# Altium PCB Liq_Controller.PcbDoc
Units mil, origin at the board's own origin, x right, y up, seen from the top; angles counter-clockwise.
Board outline 1510.03 x 3426.03 mil, 4 copper layers (Top Layer, GND, PWR, Bottom Layer), stack 62.447 mil thick; 59 components, 44 nets, 279 pads, 104 vias.
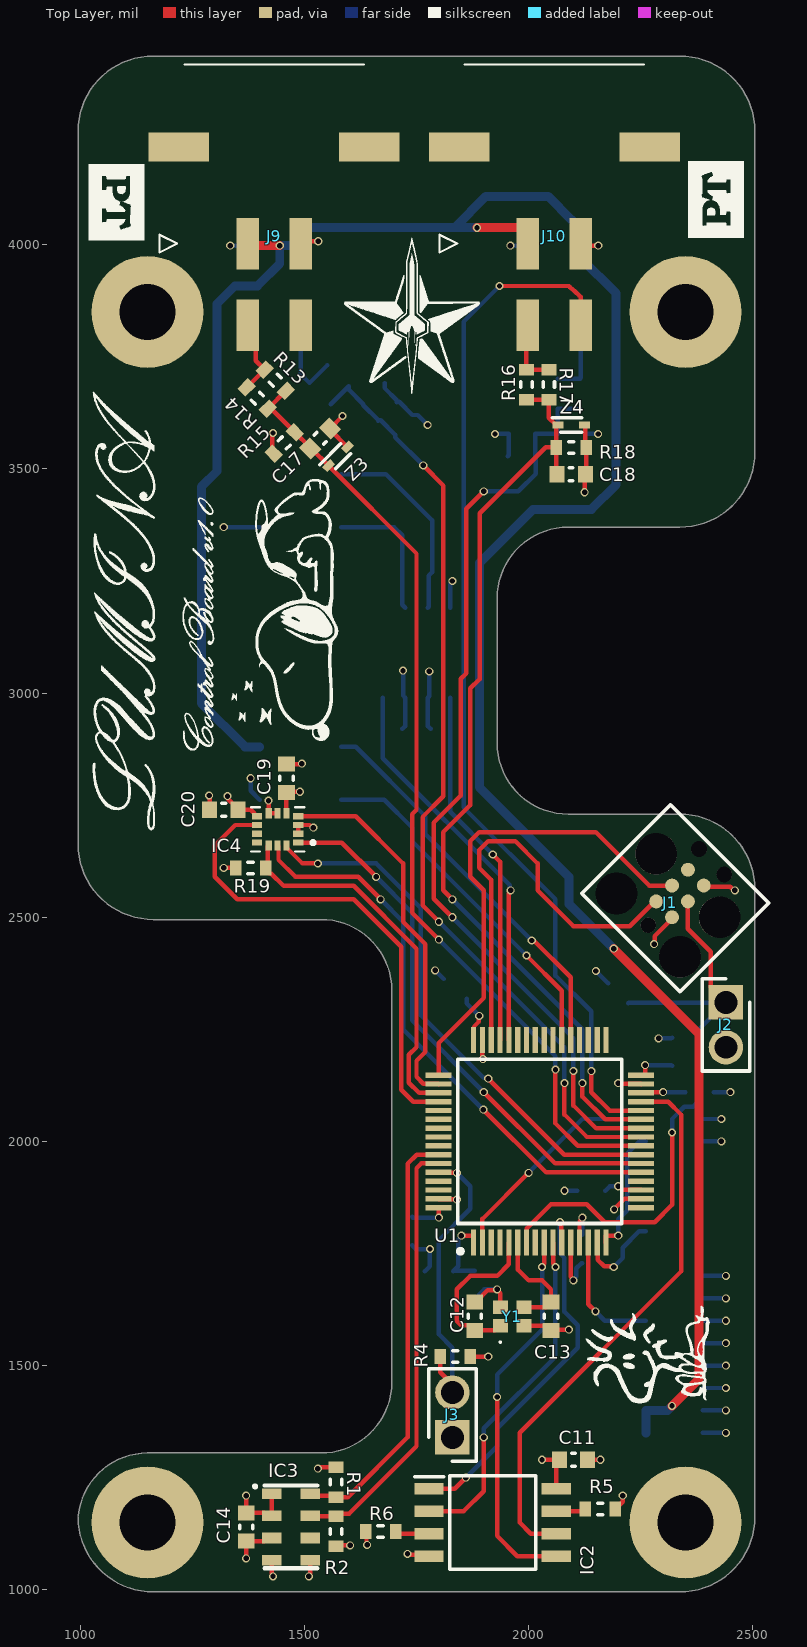
[diagram p0: Top Layer view]
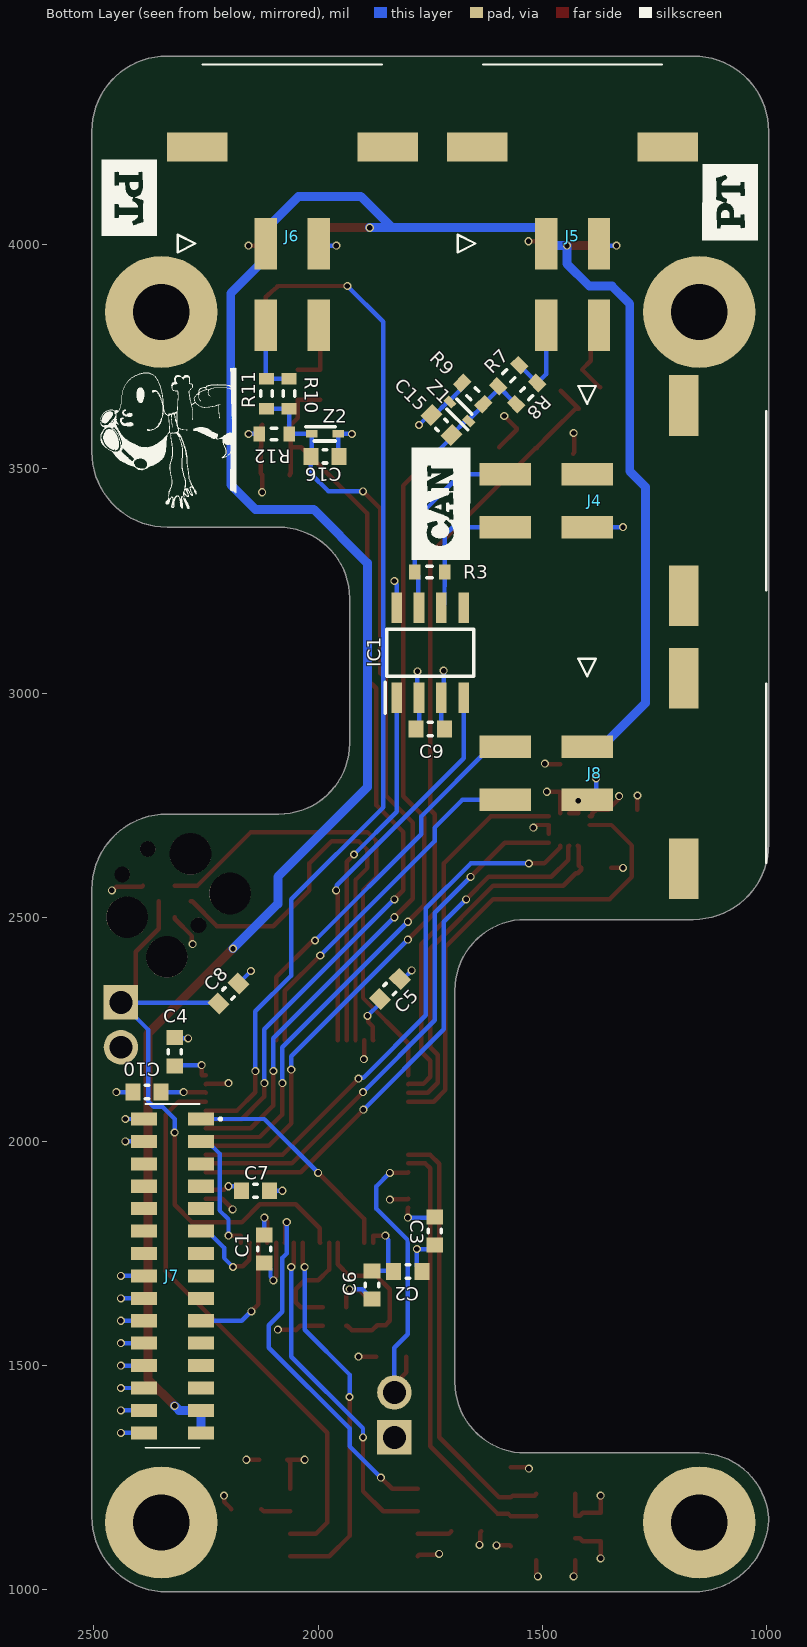
[diagram p1: Bottom Layer view, seen from below]
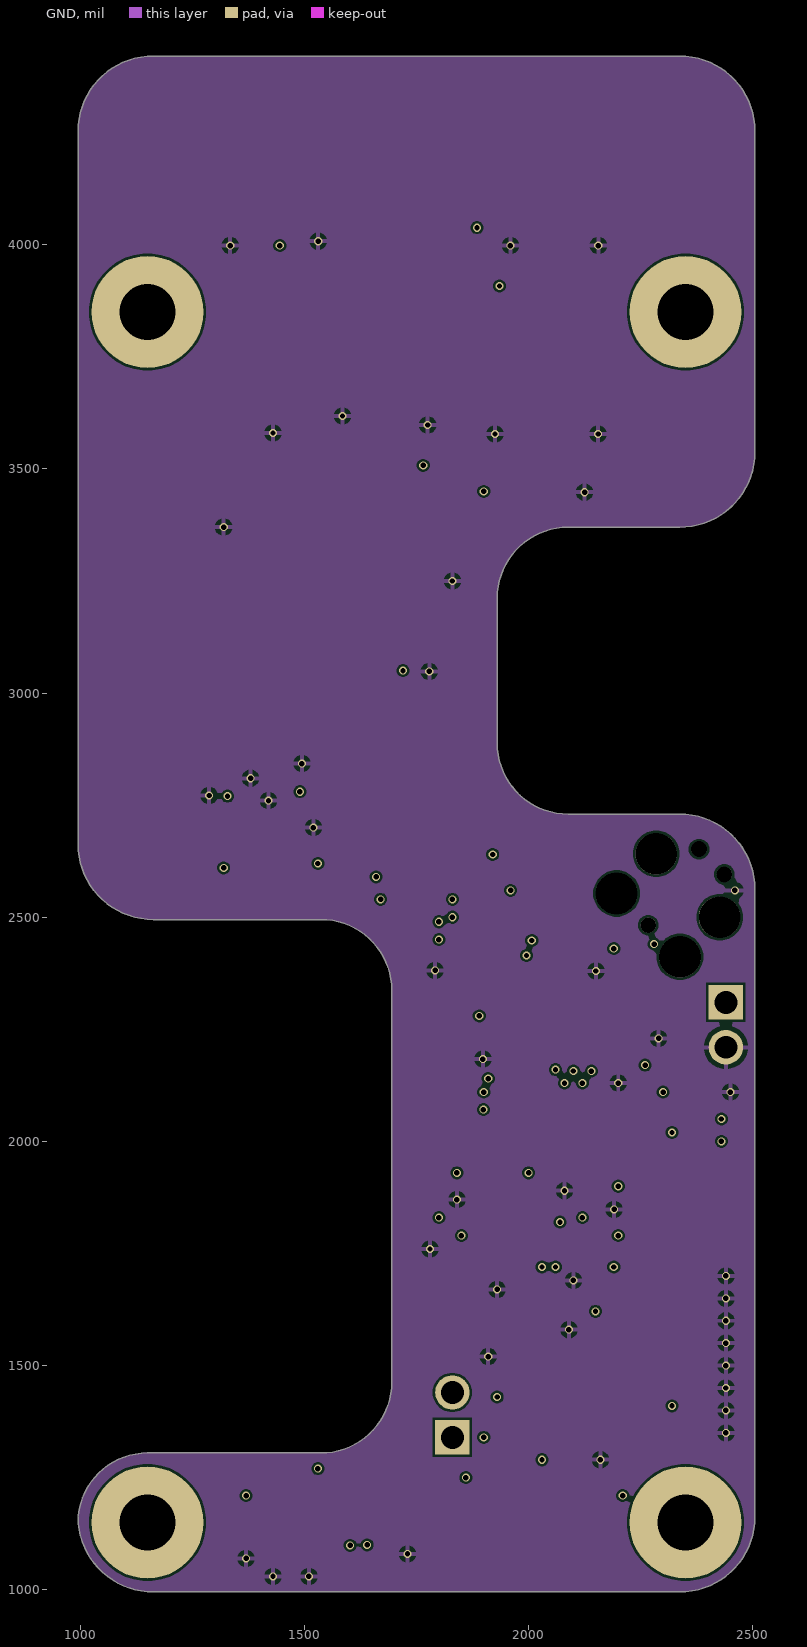
[diagram p2: GND]
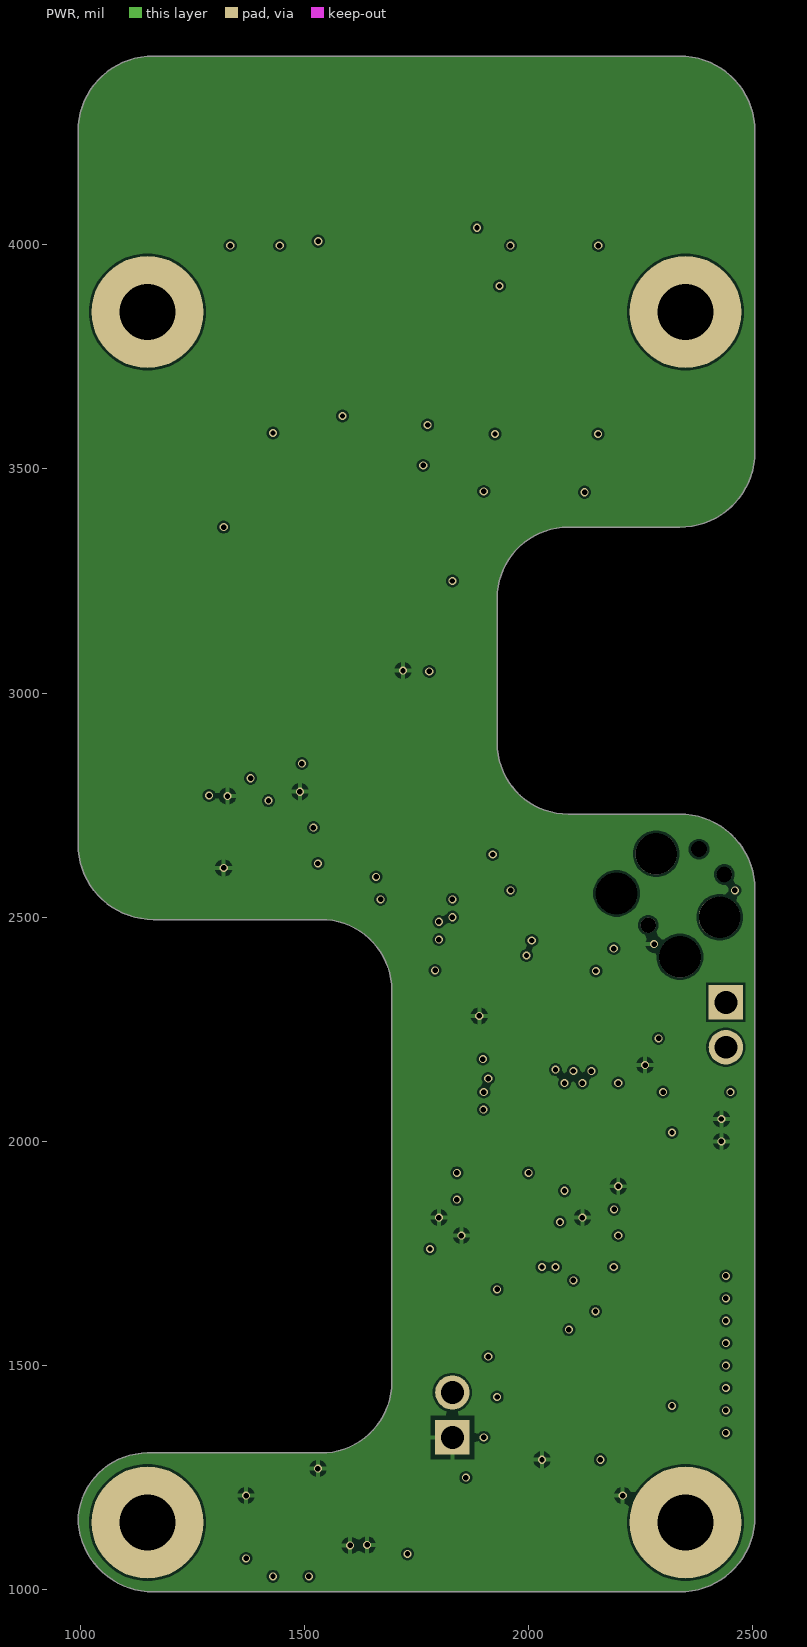
[diagram p3: PWR]
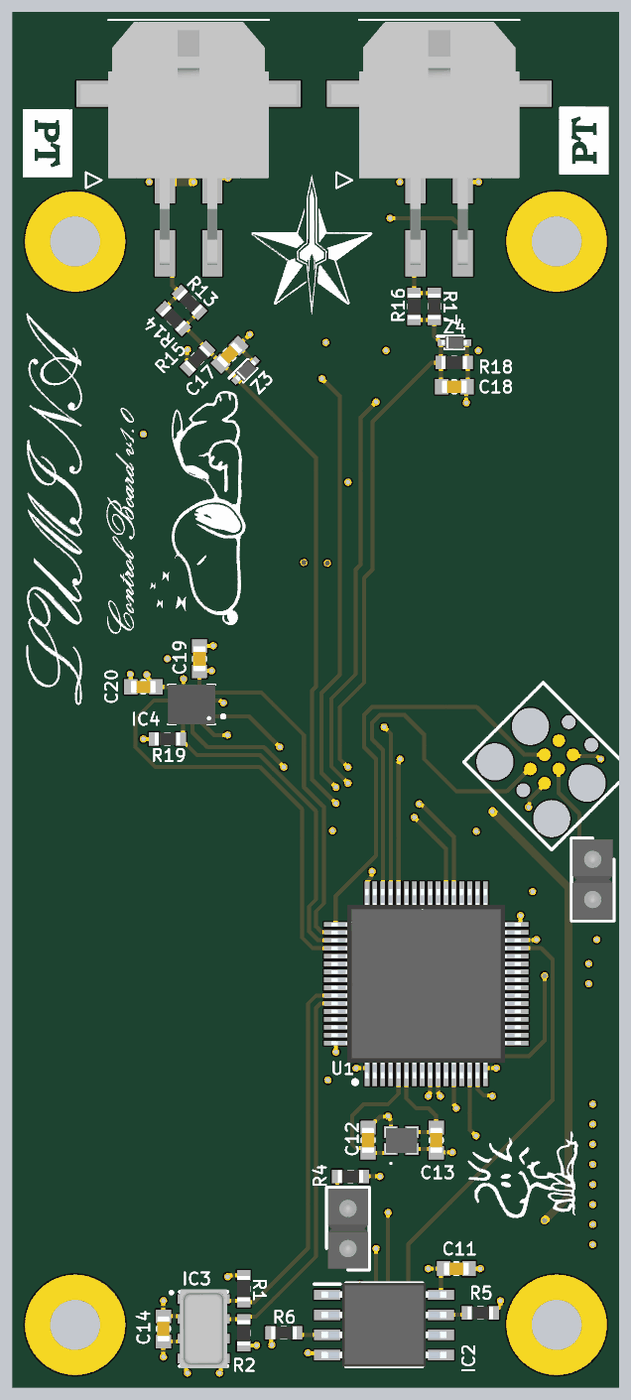
[diagram p4: 3D render of the assembled board from above, using the file's embedded part models]
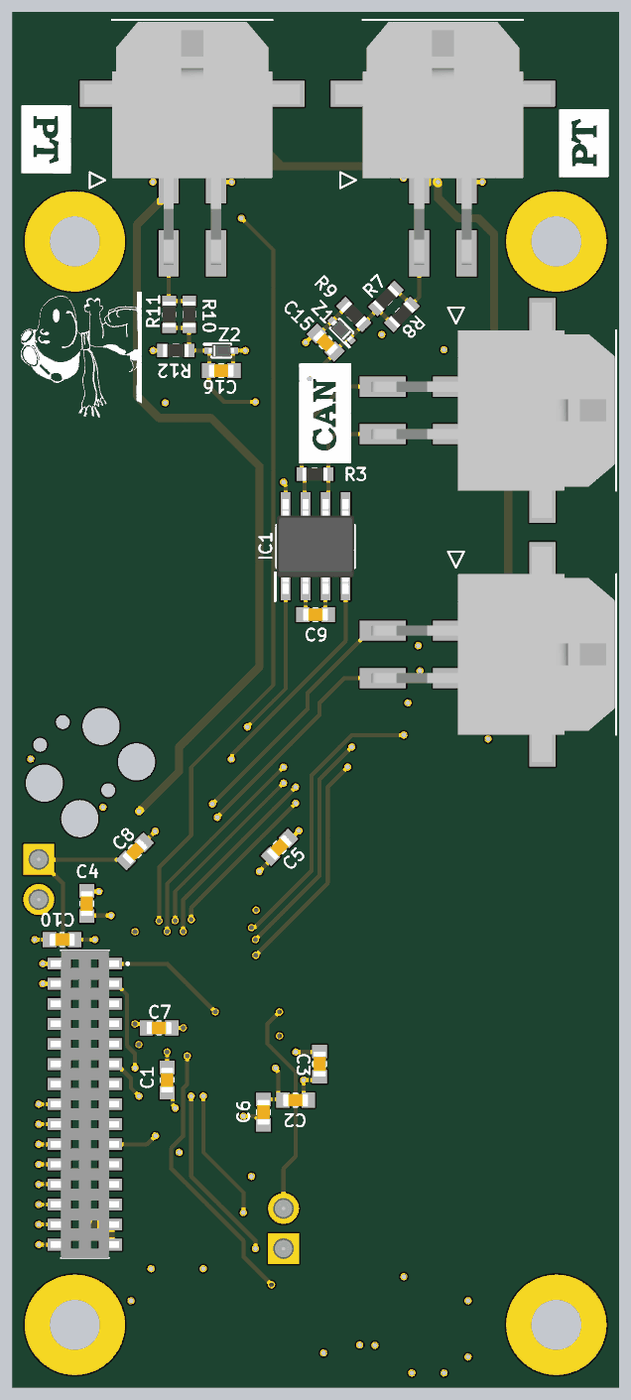
[diagram p5: 3D render of the assembled board from below, using the file's embedded part models]

## Layer stack, top to bottom
Top Solder: solder mask 0.4, Solder Resist, Dk 3.5
Top Layer: signal copper 1.378
Dielectric 2: prepreg 8.283, PP-006, Dk 4.1
GND: signal copper 0.598
Dielectric 1: dielectric 41.929, FR-4, Dk 4.8
PWR: signal copper 0.598
Dielectric 3: prepreg 8.283, PP-006, Dk 4.1
Bottom Layer: signal copper 1.378
Bottom Solder: solder mask 0.4, Solder Resist, Dk 3.5

## Board outline
995.71,1147.4 cw(c1213.58,1166.36) 995.12,1156.37 cw(c1162.94,1163) 994.99,1163 995.78,1165.72 cw(c1150,1150) 1150,1305.02 1537,1305.02 ccw(c1537,1463) 1694.98,1463 1694.98,2337 ccw(c1537,2337) 1537,2494.99 1163,2494.99 cw(c1163,2663) 994.99,2663 994.99,4253 cw(c1163,4253) 1163,4421.02 2337,4421.02 cw(c2337,4253) 2505.01,4253 2505.01,3538 cw(c2337,3538) 2337,3369.99 2088,3369.99 ccw(c2088,3212) 1930.02,3212 1930.02,2888 ccw(c2088,2888) 2088,2730.01 2337,2730.01 cw(c2337,2562) 2505.01,2562 2505.01,1163 cw(c2337,1163) 2337,994.99 1163,994.99 cw(c1163,1163)

## Design rules (kind name [scope] priority, off if disabled: settings)
Clearance [All] p1: gap=5 ignorepadtopadclearanceinfootprint=FALSE
PolygonConnect [All] p1: connectstyle=Relief reliefconductorwidth=10 reliefentries=4 polygonreliefangle="90 Angle" airgapwidth=10
RoutingVias [All] p1: holewidth=12 width=18 viastyle="Through Hole" minholewidth=12 minwidth=18 maxholewidth=28 maxwidth=50
SolderMaskExpansion [All] p1: expansion=4 istentingtop=FALSE
SupplyNets "Schematic Supply Nets_3" [InNet('VBAT')] p1: voltage=0.000
SupplyNets "Schematic Supply Nets_2" [InNet('+5')] p2: voltage=0.000
SupplyNets "Schematic Supply Nets_1" [InNet('VCC')] p3: voltage=0.000
SupplyNets "Schematic Supply Nets" [InNet('GND')] p4: voltage=0.000
Width [All] p1: maxlimit=50 minlimit=10 preferedwidth=10 minimp=50.000000 maximp=50.000000 favimp=50.000000
30 further rules are at their usual default settings.

## Classes and differential pairs
component class Liq_Controller: R1 R2 R19
component class Designator: C1 C2 C3 C4 C5 C6 C7 C8 C9 C10 C11 C12 C13 IC1 IC2 J1 J2 J3 R3 R4 R5 R6 U1 Y1

## Components (designator, comment, footprint, x,y, rotation, side; value= is the part's Value field where it differs from the comment)
C1 "100 nF" CAP_0603 2120,1760 r90 bottom
C2 "100 nF" CAP_0603 1800,1710 r0 bottom
C3 "100 nF" CAP_0603 1740,1800 r90 bottom
C4 "100 nF" CAP_0603 2320,2200 r270 bottom
C5 "1 uF" CAP_0603 1840,2340 r315 bottom
C6 "1 uF" CAP_0603 1880,1680 r90 bottom
C7 "10 nF" CAP_0603 2140,1890 r180 bottom
C8 "100 nF" CAP_0603 2200,2330 r315 bottom
C9 "100 nF" CAP_0603 1750,2920 r180 bottom
C10 "4.7 uF" CAP_0603 2381.5,2110 r0 bottom
C11 "100 nF" CAP_0603 2100,1290 r180 top
C12 "8 pF" CAP_0603 1880,1610 r270 top
C13 "8 pF" CAP_0603 2050,1610 r90 top
C14 "100 nF" CAP_0603 1370,1140 r90 top
C15 "10 nF" CAP_0603 1725,3598 r225 bottom
C16 "10 nF" CAP_0603 1985,3528 r0 bottom
C17 "10 nF" CAP_0603 1535,3568 r225 top
C18 "10 nF" CAP_0603 2095,3488 r180 top
C19 "100 nF" CAP_0603 1460,2810 r270 top
C20 "100 nF" CAP_0603 1320,2740 r0 top
IC1 "SN65HVD230DR" SOT127P600X175-8N 1750,3090 r90 bottom
IC2 "W25Q40RVSSJQ" SOIC127P790X216-8N 1920,1150 r0 top
IC3 "MS561101BA03-50" MS561101BA03-50 1470,1140 r0 top
IC4 "LSM6DSO32TR" XDCR_LSM6DSO32TR 1440.32,2695.93 r180 top
J1 "Tag-Connect" TC2030-MCP 2266.97,2482.32 r45 top
J2 "HEADER-2P" HDRV2W110P0X254_1X2_508X254X854P 2440,2310 r270 top
J3 "HEADER-2P" HDRV2W110P0X254_1X2_508X254X854P 1830,1340 r90 top
J4 "43045-0411" 43045-04YY_09101192 1491.14,3429.06 r90 bottom
J5 "43045-0411" 43045-04YY_09101192 1432.6,3911.5 r0 bottom
J6 "43045-0411" 43045-04YY_09101192 2057.4,3911.5 r0 bottom
J7 "CLP-115-02-L-D" CLP-115-02-XXX-D 2325,1700 r270 bottom
J8 "43045-0411" 43045-04YY_09101192 1491.14,2820.94 r90 bottom
J9 "43045-0411" 43045-04YY_09101192 1432.6,3911.5 r180 top
J10 "43045-0411" 43045-04YY_09101192 2057.4,3911.5 r180 top
R1 "10KΩ" RES_0603 1570,1240 r90 top
R2 "10KΩ" RES_0603 1570,1130 r270 top
R3 "120Ω" RES_0603 1751.54,3270 r180 bottom
R4 "100KΩ" RES_0603 1836.54,1520 r180 top
R5 "10KΩ" RES_0603 2160,1180 r0 top
R6 "10KΩ" RES_0603 1670,1130 r180 top
R7 "10KΩ" RES_0603 1575,3708 r135 bottom
R8 "0Ω" RES_0603 1535,3668 r135 bottom
R9 "15KΩ" RES_0603 1655,3668 r225 bottom
R10 "10KΩ" RES_0603 2065,3668 r90 bottom
R11 "0Ω" RES_0603 2115,3668 r90 bottom
R12 "15KΩ" RES_0603 2098.46,3578 r180 bottom
R13 "10KΩ" RES_0603 1435,3698 r135 top
R14 "0Ω" RES_0603 1395,3658 r135 top
R15 "15KΩ" RES_0603 1455,3558 r45 top
R16 "10KΩ" RES_0603 1995,3688 r90 top
R17 "0Ω" RES_0603 2045,3688 r90 top
R18 "15KΩ" RES_0603 2095,3548 r180 top
R19 "10KΩ" RES_0603 1380,2610 r180 top
U1 "STM32F446RET6" QFP50P1200X1200X160-64N 2025,2000 r90 top
Y1 "NX2016SA-16MHZ-EXS00A-CS07826" NX2016SA16MHZEXS00ACS07826 1963.43,1609.33 r0 top
Z1 "SZMM5Z3V9T1G" SODFL1608X70N 1685,3628 r45 bottom
Z2 "SZMM5Z3V9T1G" SODFL1608X70N 1985,3578 r180 bottom
Z3 "SZMM5Z3V9T1G" SODFL1608X70N 1575,3528 r45 top
Z4 "SZMM5Z3V9T1G" SODFL1608X70N 2095,3598 r0 top

## Footprints (in the part's own frame and the unit in brackets; to place one, negate y for a bottom-side part, rotate by r counter-clockwise, add the part's x,y. Pads: shape width x height; smd on the part's side, far side on the other; paste and mask are expansions set on the pad)
43045-04YY_09101192 [mm]
  rect 1.27x2.92 smd: 1(1.5,-2.315) 2(-1.5,-2.315) 3(1.5,2.315) 4(-1.5,2.315)
  rect 3.43x1.65 smd: 5(5.395,-7.785) 6(-5.395,-7.785)
  silkscreen extent -5.07,-12.45 6.5,-1.82, body extent -6.83,-12.35 6.83,3.04, height 8.77
CAP_0603 [mm] "0603 Generic Capacitor"
  rect 0.85x0.95 smd: 1(-0.8,0) 2(0.8,0)
  silkscreen extent -0.1,-0.38 0.1,0.38, body extent -0.8,-0.4 0.8,0.4, height 0.8
CLP-115-02-XXX-D [mm]
  rect 0.74x1.47 smd: 1(-8.89,1.615) 2(-8.89,-1.615) 3(-7.62,1.615) 4(-7.62,-1.615) 5(-6.35,1.615) 6(-6.35,-1.615) 7(-5.08,1.615) 8(-5.08,-1.615) 9(-3.81,1.615) 10(-3.81,-1.615) 11(-2.54,1.615) 12(-2.54,-1.615) 13(-1.27,1.615) 14(-1.27,-1.615) 15(0,1.615) 16(0,-1.615) 17(1.27,1.615) 18(1.27,-1.615) 19(2.54,1.615) 20(2.54,-1.615) 21(3.81,1.615) 22(3.81,-1.615) 23(5.08,1.615) 24(5.08,-1.615) 25(6.35,1.615) 26(6.35,-1.615) 27(7.62,1.615) 28(7.62,-1.615) 29(8.89,1.615) 30(8.89,-1.615)
  silkscreen extent -9.74,-1.53 9.74,2.76, body extent -9.74,-2.16 9.74,2.16, height 2.29
HDRV2W110P0X254_1X2_508X254X854P [mm]
  rect 1.95x1.95 hole 1.3: 1(0,0)
  round 1.95 hole 1.3: 2(2.54,0)
  silkscreen extent -1.35,-1.35 3.89,1.35, body extent -1.27,-1.27 3.81,1.27, height 8.54
MS561101BA03-50 [mm]
  rect 1.1x0.6 smd: 1(-1.1,1.875) 2(-1.1,0.625) 3(-1.1,-0.625) 4(-1.1,-1.875) 5(1.1,-1.875) 6(1.1,-0.625) 7(1.1,0.625) 8(1.1,1.875)
  silkscreen extent -2.08,-2.35 1.5,2.35, body extent -1.5,-2.5 1.5,2.5, height 0.95
NX2016SA16MHZEXS00ACS07826 [mm]
  rect 0.85x0.75 smd: 1(-0.675,-0.525) 2(0.675,-0.525) 3(0.675,0.525) 4(-0.675,0.525)
  silkscreen extent -0.72,-1.5 -0.63,-1.4, body extent -1.03,-0.82 1.02,0.82, height 0.6
QFP50P1200X1200X160-64N [mm]
  rect 1.475x0.3 smd: 1(-5.738,3.75) 2(-5.738,3.25) 3(-5.738,2.75) 4(-5.738,2.25) 5(-5.738,1.75) 6(-5.738,1.25) 7(-5.738,0.75) 8(-5.738,0.25) 9(-5.738,-0.25) 10(-5.738,-0.75) 11(-5.738,-1.25) 12(-5.738,-1.75) 13(-5.738,-2.25) 14(-5.738,-2.75) 15(-5.738,-3.25) 16(-5.738,-3.75) 33(5.738,-3.75) 34(5.738,-3.25) 35(5.738,-2.75) 36(5.738,-2.25) 37(5.738,-1.75) 38(5.738,-1.25) 39(5.738,-0.75) 40(5.738,-0.25) 41(5.738,0.25) 42(5.738,0.75) 43(5.738,1.25) 44(5.738,1.75) 45(5.738,2.25) 46(5.738,2.75) 47(5.738,3.25) 48(5.738,3.75)
  rect 0.3x1.475 smd: 17(-3.75,-5.738) 18(-3.25,-5.738) 19(-2.75,-5.738) 20(-2.25,-5.738) 21(-1.75,-5.738) 22(-1.25,-5.738) 23(-0.75,-5.738) 24(-0.25,-5.738) 25(0.25,-5.738) 26(0.75,-5.738) 27(1.25,-5.738) 28(1.75,-5.738) 29(2.25,-5.738) 30(2.75,-5.738) 31(3.25,-5.738) 32(3.75,-5.738) 49(3.75,5.738) 50(3.25,5.738) 51(2.75,5.738) 52(2.25,5.738) 53(1.75,5.738) 54(1.25,5.738) 55(0.75,5.738) 56(0.25,5.738) 57(-0.25,5.738) 58(-0.75,5.738) 59(-1.25,5.738) 60(-1.75,5.738) 61(-2.25,5.738) 62(-2.75,5.738) 63(-3.25,5.738) 64(-3.75,5.738)
  silkscreen extent -6.35,-4.65 4.65,4.65, body extent -6,-6 6,6, height 1.6
RES_0603 [mm] "0603 Generic Resistor"
  rect 0.65x0.85 smd: 1(-0.85,0) 2(0.85,0)
  silkscreen extent -0.15,-0.33 0.15,0.33, body extent -0.8,-0.4 0.8,0.4, height 0.45
SODFL1608X70N [mm]
  rect 0.64x0.42 smd: 1(-0.75,0) 2(0.75,0)
  silkscreen extent -1.07,-0.4 0.6,0.4, body extent -0.8,-0.4 0.8,0.4, height 0.7
SOIC127P790X216-8N [mm]
  rect 1.65x0.65 smd: 1(-3.6,1.905) 2(-3.6,0.635) 3(-3.6,-0.635) 4(-3.6,-1.905) 5(3.6,-1.905) 6(3.6,-0.635) 7(3.6,0.635) 8(3.6,1.905)
  silkscreen extent -4.43,-2.64 2.42,2.64, body extent -3.95,-2.64 3.95,2.64, height 2.16
SOT127P600X175-8N [mm]
  rect 1.75x0.6 smd: 1(-2.55,1.905) 2(-2.55,0.635) 3(-2.55,-0.635) 4(-2.55,-1.905) 5(2.55,-1.905) 6(2.55,-0.635) 7(2.55,0.635) 8(2.55,1.905)
  silkscreen extent -3.42,-2.45 1.33,2.56, body extent -3.01,-2.45 3.01,2.45, height 1.63
TC2030-MCP [mil]
  round 31 smd paste-99999: 1(50,-25) 2(50,25) 3(100,-25) 4(100,25) 5(150,-25) 6(150,25)
  round 34 hole 35 unplated: A(0,0) B(200,40) C(200,-40)
  round 92 hole 93 unplated: D(0,-100) E(125,-100) F(0,100) G(125,100)
  silkscreen extent -55,-155 225,155
XDCR_LSM6DSO32TR [mm]
  rect 0.575x0.35 smd mask+0.05: 1(-1.162,0.75) 2(-1.162,0.25) 3(-1.162,-0.25) 4(-1.162,-0.75) 8(1.162,-0.75) 9(1.162,-0.25) 10(1.162,0.25) 11(1.162,0.75)
  rect 0.35x0.575 smd mask+0.05: 5(-0.5,-0.913) 6(0,-0.913) 7(0.5,-0.913) 12(0.5,0.913) 13(0,0.913) 14(-0.5,0.913)
  silkscreen extent -2.1,-1.25 1.5,1.25, body extent -1.5,-1.25 1.5,1.25, height 0.86

## Part data
C1 C2 C3 C4 C8 C9 C14: library part "100 nF Capacitor, 0603", "Multilayer Ceramic Capacitors MLCC - SMD/SMT KGM15BR71H104JT NEW GLOBAL PN 50V 0.1uF A 581-KGM15BR71H104JT", Manufacturer 1="KYOCERA AVX", Manufacturer Part Number 1=06035C104JAT2A, Package=0603, Supplier Part Number 1=581-06035C104JAT2A, Tolerance=5%, Voltage="50 V", Design Item ID="100 nF Capacitor, 0603", Library Ref=Capacitor_BASE, Supplier 1=Mouser
C5 C6: library part "1 uF Capacitor, 0603", "Multilayer Ceramic Capacitors MLCC - SMD/SMT KGM15BR71H224JT NEW GLOBAL PN 50V 0.22uF A 581-KGM15BR71H224JT", Manufacturer 1="KYOCERA AVX", Manufacturer Part Number 1=06033C105KAT2A, Package=0603, Supplier Part Number 1=581-06033C105KAT2A, Tolerance=10%, Voltage="25 V", Design Item ID="1 uF Capacitor, 0603", Library Ref=Capacitor_BASE, Supplier 1=Mouser
C7: library part "10 nF Capacitor, 0603", "Multilayer Ceramic Capacitors MLCC - SMD/SMT KGM15AR71H103JM NEW GLOBAL PN 50V 0.01uF A 581-KGM15AR71H103JM", Manufacturer 1="KYOCERA AVX", Manufacturer Part Number 1=06035C103JAT4A, Package=0603, Supplier Part Number 1=581-06035C103JAT4A, Tolerance=5%, Voltage="50 V", Design Item ID="10 nF Capacitor, 0603", Library Ref=Capacitor_BASE, Supplier 1=Mouser
C10: library part "4.7 uF Capacitor, 0603", "Multilayer Ceramic Capacitors MLCC - SMD/SMT KGM15BR71H224JT NEW GLOBAL PN 50V 0.22uF A 581-KGM15BR71H224JT", Manufacturer 1="KYOCERA AVX", Manufacturer Part Number 1=06033D475KAT2A, Package=0603, Supplier Part Number 1=581-06033D475KAT2A, Tolerance=10%, Voltage="25 V", Design Item ID="4.7 uF Capacitor, 0603", Library Ref=Capacitor_BASE, Supplier 1=Mouser
C11 C19 C20: library part "100 nF Capacitor, 0603", "Multilayer Ceramic Capacitors MLCC - SMD/SMT KGM15BR71H104JT NEW GLOBAL PN 50V 0.1uF A 581-KGM15BR71H104JT", Manufacturer 1="KYOCERA AVX", Manufacturer Part Number 1=06035C104JAT2A, MPN=581-06035C104JAT2A, Package=0603, Tolerance=5%, Voltage="50 V", Design Item ID="100 nF Capacitor, 0603", Library Ref=Capacitor_BASE, Supplier 1=Mouser
C12 C13: library part "8 pF Capacitor, 0603", "Multilayer Ceramic Capacitors MLCC - SMD/SMT 50V 8pF C0G 0603 5%", Manufacturer 1="KYOCERA AVX", Manufacturer Part Number 1=06035A8R0JAT2A, Package=0603, Supplier Part Number 1=581-06035A8R0JAT2A, Tolerance=5%, Voltage="50 V", Design Item ID="8 pF Capacitor, 0603", Library Ref=Capacitor_BASE, Supplier 1=Mouser
C15 C16 C17 C18: library part "10 nF Capacitor, 0603", "Multilayer Ceramic Capacitors MLCC - SMD/SMT KGM15AR71H103JM NEW GLOBAL PN 50V 0.01uF A 581-KGM15AR71H103JM", Manufacturer 1="KYOCERA AVX", Manufacturer Part Number 1=06035C103JAT4A, MPN=581-06035C103JAT4A, Package=0603, Tolerance=5%, Voltage="50 V", Design Item ID="10 nF Capacitor, 0603", Library Ref=Capacitor_BASE, Supplier 1=Mouser
IC1: "CAN Transceiver", Manufacturer_Name="Texas Instruments", Mouser Part Number=595-SN65HVD230DR, Arrow Part Number=SN65HVD230DR, Arrow Price/Stock=https://www.arrow.com/en/products/sn65hvd230dr/texas-instruments?utm_currency=USD&region=nac, Datasheet Link=http://www.ti.com/lit/gpn/sn65hvd230, Height=1.75mm, Manufacturer_Part_Number=SN65HVD230DR, Mouser Price/Stock=https://www.mouser.co.uk/ProductDetail/Texas-Instruments/SN65HVD230DR?qs=QViXGNcIEAtifeQR3pYVUQ%3D%3D
IC2: "4 Mbit NOR Flash", Manufacturer_Name=Winbond, MPN=454-W25Q40RVSSJQ, Datasheet Link=https://www.winbond.com/hq/search-resource-file.jsp?partNo=W25Q40RVSSJQ&type=datasheet, Height=2.16mm, Manufacturer_Part_Number=W25Q40RVSSJQ
IC3: "Integrated Circuit", Manufacturer_Name="TE Connectivity", MPN=824-MS561101BA03-50, Arrow Part Number=MS561101BA03-50, Arrow Price/Stock=https://www.arrow.com/en/products/ms561101ba03-50/te-connectivity?utm_currency=USD&region=nac, Datasheet Link=https://www.te.com/commerce/DocumentDelivery/DDEController?Action=srchrtrv&DocNm=MS5611-01BA03&DocType=Data%20Sheet&DocLang=English&PartCntxt=MS561101BA03-50&DocFormat=pdf, Manufacturer_Part_Number=MS561101BA03-50, Mouser Price/Stock=https://www.mouser.co.uk/ProductDetail/Measurement-Specialties/MS561101BA03-50?qs=%252BgKeJhng5iV%252BnCz6Qd5iDw%3D%3D, Supplier 1=Mouser, Supplier Part Number 1=824-MS561101BA03-50
IC4: "Accelerometer, Gyroscope, Temperature, 6 Axis Sensor IÂ²C, SPI Output", MPN=511-LSM6DSO32TR, Package="VFLGA-14 STMicroelectronics", Check_prices=https://www.snapeda.com/parts/LSM6DSO32TR/STMicroelectronics/view-part/?ref=eda, MF=STMicroelectronics, SnapEDA_Link=https://www.snapeda.com/parts/LSM6DSO32TR/STMicroelectronics/view-part/?ref=snap
J1: "Tag-Connect Programming Connector"
J2 J3: "Connector / 61300211121", Manufacturer_Name="Wurth Elektronik", Manufacturer_Part_Number=61300211121, Mouser Part Number=710-61300211121, Datasheet Link=https://componentsearchengine.com/Datasheets/2/61300211121.pdf, Height=8.54mm, Mouser Price/Stock=https://www.mouser.co.uk/ProductDetail/Wurth-Elektronik/61300211121?qs=t4813l51qx%252B1A5GYDQxPlw%3D%3D
J4 J5 J6 J8 J9 J10: "Connector", Manufacturer_Name=Molex, Mouser Part Number=538-43045-0411, Datasheet Link=https://www.molex.com/pdm_docs/sd/430450209_sd.pdf, Height=8.77mm, Manufacturer_Part_Number=43045-0411, Mouser Price/Stock=https://www.mouser.co.uk/ProductDetail/Molex/43045-0411?qs=UeCeOHRHQeZrBAGCFCweeA%3D%3D
J7: "2x15 Board to Board", Manufacturer_Name=SAMTEC, Mouser Part Number=200-CLP11502LD, Arrow Part Number=CLP-115-02-L-D, Arrow Price/Stock=https://www.arrow.com/en/products/clp-115-02-l-d/samtec, Datasheet Link=https://www.samtec.com/products/clp, Manufacturer_Part_Number=CLP-115-02-L-D, Mouser Price/Stock=https://www.mouser.co.uk/ProductDetail/Samtec/CLP-115-02-L-D?qs=0lQeLiL1qyYF3PC5crt2Dg%3D%3D
R1 R2 R5 R6 R7 R10 R13 R16 R19: library part "10 KOhm Resistor", "Thick Film Resistors - SMD General Purpose Chip Resistor 0603, 10kOhms, 1%, 1/10W", Manufacturer 1=YAGEO, Manufacturer Part Number 1=RC0603FR-0710KL, MPN=603-RC0603FR-0710KL, Package=0603, Power=0.1W, Tolerance=0.01, Design Item ID="10 KOhm Resistor", Library Ref=Resistor_BASE, Supplier 1=Mouser
R3: library part "120 Ohm Resistor", "Thick Film Resistors - SMD General Purpose Chip Resistor 0603, 120Ohms, 1%, 1/10W", Manufacturer 1=YAGEO, Manufacturer Part Number 1=RC0603FR-07120RL, Package=0603, Power=0.1W, Supplier Part Number 1=603-RC0603FR-07120RL, Tolerance=0.01, Design Item ID="120 Ohm Resistor", Library Ref=Resistor_BASE, Supplier 1=Mouser
R4: library part "100 KOhm Resistor", "Thick Film Resistors - SMD General Purpose Chip Resistor 0603, 100kOhms, 1%, 1/10W", Manufacturer 1=YAGEO, Manufacturer Part Number 1=RC0603FR-07100KL, Package=0603, Power=0.1W, Supplier Part Number 1=603-RC0603FR-07100KL, Tolerance=0.01, Design Item ID="100 KOhm Resistor", Library Ref=Resistor_BASE, Supplier 1=Mouser
R8 R11 R14 R17: library part "0 Ohm Resistor", "Thick Film Resistors - SMD General Purpose Chip Resistor 0603, 0Ohms, 1%, 1/10W", Manufacturer 1=YAGEO, Manufacturer Part Number 1=RC0603FR-070RL, MPN=603-RC0603FR-070RL, Package=0603, Power=0.1W, Tolerance=0.01, Design Item ID="0 Ohm Resistor", Library Ref=Resistor_BASE, Supplier 1=Mouser
R9 R12 R15 R18: library part "15 KOhm Resistor", "Thick Film Resistors - SMD General Purpose Chip Resistor 0603, 15kOhms, 1%, 1/10W", Manufacturer 1=YAGEO, Manufacturer Part Number 1=RC0603FR-0715KL, MPN=603-RC0603FR-0715KL, Package=0603, Power=0.1W, Tolerance=0.01, Design Item ID="15 KOhm Resistor", Library Ref=Resistor_BASE, Supplier 1=Mouser
U1: "ARM Cortex-M4 32-bit MCU+FPU, 512 KB Flash, 128 KB Internal RAM, 50 I/Os, 64-Pin LQFP, -40 to 85 degC, Tray", I/Os (High Current)=50, Operating Frequency(F) (Processor speed) (MHz)=180, Package Description=LQFP64, Package Reference="64-Pin Low-profile Quad Flat Package, Body 10 x 10 mm, Pitch 0.5 mm", Supply Voltage(Vcc) min (V)=1.7, ComponentLink1Description="Manufacturer URL", ComponentLink1URL=http://www.st.com/, ComponentLink2Description=Datasheet, ComponentLink2URL=http://www.st.com/st-web-ui/static/active/en/resource/technical/document/datasheet/DM00141306.pdf, Core="ARM Cortex-M4", D/A Converter=2, DatasheetVersion="Rev. 6", FLASH Size (Prog) (kB)=512, Internal RAM Size (kB)=128, Mounting Technology="Surface Mount", Packing=Tray
Y1: "Crystal Oscillator", Manufacturer_Name=NDK, Mouser Part Number=344-MHZEXS00ACS07826, Datasheet Link=https://www.ndk.com/images/products/catalog/c_NX2016SA_e.pdf, Height=0.5mm, Manufacturer_Part_Number=NX2016SA-16MHZ-EXS00A-CS07826, Mouser Price/Stock=https://www.mouser.co.uk/ProductDetail/NDK/NX2016SA-16MHZ-EXS00A-CS07826?qs=%252BXxaIXUDbq1kHvfpfcpbvQ%3D%3D, Supplier 1=Mouser, Supplier Part Number 1=344-MHZEXS00ACS07826
Z1 Z2 Z3 Z4: "Zener Diode", Manufacturer_Name=onsemi, Mouser Part Number=863-SZMM5Z3V9T1G, Arrow Part Number=SZMM5Z3V9T1G, Arrow Price/Stock=https://www.arrow.com/en/products/szmm5z3v9t1g/on-semiconductor, Datasheet Link=https://www.onsemi.com/pub/Collateral/MM5Z2V4T1-D.PDF, Height=0.7mm, Manufacturer_Part_Number=SZMM5Z3V9T1G, Mouser Price/Stock=https://www.mouser.co.uk/ProductDetail/ON-Semiconductor/SZMM5Z3V9T1G?qs=tCMd4XlZ%2FiBFVFj5mgJKfg%3D%3D

## Free pads (board coordinates)
  round 250 hole 125: 22(1150,1150) 22(1150,3850) 22(2350,1150) 22(2350,3850)

## Via types
v1: diameter 18, hole 12, Top Layer to Bottom Layer, 104 vias

## Nets (pads, with @x,y where several pads share a name; then routed paths per layer and width w, separated by ;. In a path a pad name is that pad's centre, name@x,y a point inside that pad or via, vN(x,y) a via of type N, cw(c..) or ccw(c..) an arc to the next point about the centre after c; other vN are vias at no path point)
+5: J5.1 J6.1 J7.27 J7.29 J8.1 J9.1 J10.1 | length 5429.6
  Top Layer w20: J9.1 1378.19,3998 v1(1445,3998) ; v1(1885,4038) 1995.47,4038 J10.1@1998.35,4035.13 ; v1(2190,2430) 2380,2240 2380,1470 v1(2320,1410)
  Bottom Layer w20: J8.1 1367.52,2880 1270,2977.52 1270,3460 1305,3495 1305,3868 1345,3908 1395,3908 1445,3958 v1(1445,3998) 1487.01,3998 J5.1 1491.65,4023 1506.65,4038 1835,4038 ; v1(1885,4038) 1835,4038 ; J6.1@2096.46,4055.13 2043.58,4108 1905,4108 1835,4038 ; J6.1 2116.46,3970.17 2195,3891.62 2195,3465 2140,3410 2010,3410 1890,3290 1890,2790 2090,2590 2090,2530 v1(2190,2430) ; J7.29 J7.27 2310,1400 v1(2320,1410)
BOOT0: J3.2 R4.2 U1.60 | length 676.4
  Top Layer w10: U1.60 1800.2,1930 v1(1840,1930) ; R4.2 1803.07,1485 1830,1458.07 J3.2
  Bottom Layer w10: J3.2 1830,1540 1800,1570 1800,1780 1870,1850 1870,1900 v1(1840,1930)
Camera2_In: J7.19 U1.14 | length 281
  Top Layer w10: U1.14 2133.27,1636.73 2149.17,1620.83 v1(2149.17,1621.04)
  Bottom Layer w10: v1(2149.17,1621.04) 2170.21,1600 J7.19
Camera2_IS: J7.11 U1.15 | length 199.2
  Top Layer w10: U1.15 2153.86,1773.19 2153.86,1736.14 2168.47,1721.53 2188.47,1721.53 v1(2190,1720)
  Bottom Layer w10: v1(2190,1720) 2210,1740 2210,1762.95 2247.05,1800 J7.11
Camera_In: J7.1 U1.2 | length 509.7
  Top Layer w10: U1.2 1897.05,1827.05 v1(2000,1930)
  Bottom Layer w10: v1(2000,1930) 2120,2050 J7.1
Camera_IS: J7.3 U1.16 | length 286.6
  Top Layer w10: U1.16 2172.64,1789.09 2173.54,1790 v1(2200,1790)
  Bottom Layer w10: v1(2200,1790) 2200,1826.08 2220,1846.08 2220,1972.95 2247.05,2000 J7.3
"CAN1 RX": IC1.4 U1.44 | length 883.4
  Top Layer w10: U1.44 1956.1,2553.94 1960,2557.84 v1(1960,2560)
  Bottom Layer w10: IC1.4 1675,2855 1958.47,2571.53 1958.47,2561.53 v1(1960,2560)
"CAN1 TX": IC1.1 U1.45 | length 809.9
  Top Layer w10: v1(1920,2640) 1936.42,2623.58 U1.45
  Bottom Layer w10: IC1.1 1825,2735 v1(1920,2640)
CANH: IC1.7 J4.3 R3.1 | length 444.2
  Bottom Layer w10: J4.3 1681.89,3488.11 1785,3385 R3.1 1777.2,3262.2 1777.2,3192.6 IC1.7
CANL: IC1.6 J4.4 R3.2 | length 307.7
  Bottom Layer w10: J4.4 1700,3370 1718.07,3351.93 R3.2 1718.07,3238.27 1718.19,3238.15 1718.19,3197.2 IC1.6
Flash_CS: IC2.1 U1.11 | length 829.9
  Top Layer w10: IC2.1 1835,1225 v1(1860,1250) ; v1(2070,1820) 2070,1817.84 2073.31,1814.53 2073.31,1775 U1.11
  Bottom Layer w10: v1(1860,1250) 1930,1320 1930,1360 2110,1540 2110,1590 2080,1620 2080,1740 2070,1750 v1(2070,1820)
GND: C1.1 C2.1 C3.1 C4.1 C5.1 C6.1 C7.2 C8.1 C9.1 C10.2 C11.1 C12.1 C13.1 C14.1 C15.1 C16.1 C17.1 C18.1 C19.1 C20.1 IC1.2 IC1.8 IC2.4 IC3.3 IC3.4 IC3.5 IC4.2 IC4.3 IC4.6 IC4.7 J1.5 J2.2 J4.2 J5.2 J6.2 J7.16 J7.18 J7.20 J7.22 J7.24 J7.26 J7.28 J7.30 J8.2 J9.2 J10.2 R4.1 R9.1 R12.1 R15.1 R18.1 U1.12 U1.18 U1.31 U1.47 U1.63 Y1.2 Y1.4 Z1.2 Z2.2 Z3.2 Z4.2 | length 2858.9
  Top Layer w10: v1(1287.62,2771.59) 1288.5,2770.7 C20.1 ; v1(1370,1070) C14.1 1409.96,1108.5 1416.85,1115.39 IC3.3 ; v1(1420,2760) 1420.32,2759.68 1420.32,2732.17 IC4.7 IC4.6 ; IC3.4 1426.69,1035.47 1430,1032.16 v1(1430,1030) ; v1(1430,3580) 1428.55,3578.55 1428.55,3537.12 R15.1 ; C19.1 1493.13,2841.5 v1(1494.27,2842.64) ; IC4.2 IC4.3 1512.07,2705.77 1517.84,2700 v1(1520,2700) ; J9.2 1496.86,4007.85 v1(1530.8,4007.85) ; v1(1510,1030) 1510,1032.16 1513.31,1035.47 IC3.5 ; v1(1585,3618) C17.1 1557.27,3587.49 Z3.2 ; v1(1730,1080) 1731.53,1078.47 1774.8,1078.47 IC2.4 ; U1.63 1800,1871.14 1838.86,1871.14 v1(1840,1870) ; R4.1 v1(1910,1520) ; C12.1 1881.97,1641.5 1908.94,1668.47 1928.47,1668.47 v1(1930,1670) 1930,1667.84 1936.85,1660.98 Y1.4 ; U1.47 1897.05,2184.7 v1(1898.12,2183.63) ; Y1.2 2039.84,1588.66 C13.1 2051.5,1580 v1(2090,1580) ; U1.12 2093.9,1698.27 2100,1692.16 v1(2100,1690) ; J10.2 2121.1,3998 v1(2155.46,3998) ; Z4.2 2126.5,3596.03 2126.5,3549.97 R18.1 2128.46,3489.97 C18.1 2125,3486.5 v1(2125,3448) ; C11.1 v1(2160,1290) ; v1(2190.66,1848.57) 2214.13,1872.05 U1.18 ; v1(2200,2130) 2201.14,2128.86 2250,2128.86 U1.31 ; J1.5 2393.46,2567.96 2449.88,2567.96 2457.84,2560 v1(2460,2560)
  Bottom Layer w10: v1(1320,3370) J4.2 ; v1(1334.54,3998) 1368.9,3998 J5.2 ; v1(1380,2810) 1380,2781.89 J8.2 ; R9.1 1678.66,3680.64 1705.88,3653.42 Z1.2 1706.63,3649.63 1711.25,3649.63 1740.61,3620.27 1752.73,3620.27 v1(1775,3598) ; C3.1 1748.5,1760 v1(1780,1760) 1780,1721.5 C2.1 ; v1(1778.47,3048.47) 1778.47,2993.08 IC1.2 1775,2926.5 C9.1 ; v1(1791.56,2381.37) C5.1@1810.66,2362.27 ; IC1.8 1825,3242.84 1830,3247.84 v1(1830,3250) ; C6.1 1901.5,1670 v1(1930,1670) ; v1(1925,3578) Z2.2 1955.47,3529.97 C16.1 ; v1(1959.35,3998) 1993.7,3998 J6.2 ; v1(2080,1890) C7.2 ; v1(2100,1690) 2100,1692.16 2106.3,1698.46 2106.3,1716.77 2118.03,1728.5 C1.1 ; R12.1 v1(2155,3578) ; v1(2150,2380) C8.1 ; v1(2290,2230) 2318.5,2230 C4.1 ; J7.30 v1(2440,1350) ; J7.28 2439.95,1400 v1(2440.12,1400.18) ; J7.26 2390,1450 v1(2440,1450) ; J7.24 v1(2440,1500) ; J7.22 v1(2440,1550) ; J7.20 v1(2440,1600) ; J7.18 v1(2440,1650) ; J7.16 v1(2440,1700) ; C10.2 v1(2450,2110)
I2C1_SCL: IC3.8 R1.1 U1.58 | length 962.6
  Top Layer w10: IC3.8 1516.95,1210.18 1566.36,1210.18 R1.1 1596.54,1206.54 1730,1340 1730,1950 1750.47,1970.47 U1.58
I2C1_SDA: IC3.7 R2.1 U1.59 | length 975.6
  Top Layer w10: IC3.7 1513.88,1164.04 1569.43,1164.04 R2.1 1576.54,1170 1600,1170 1750,1320 1750,1940 1760.79,1950.79 U1.59
IMU_CS: IC4.12 R19.1 U1.51 | length 847.9
  Top Layer w10: IC4.12 1418.74,2658.11 1418.74,2615.28 R19.1 1413.46,2606.06 1421.26,2598.27 1425.2,2598.27 1453.46,2570 1610,2570 1750,2430 1750,2210 1733,2193 1733,2131 1755.73,2108.27 U1.51
IMU_Int1: IC4.4 U1.50 | length 838.3
  Top Layer w10: IC4.4 1614.55,2725.45 1720,2620 1720,2490 1770,2440 1770,2200 1750,2180 1750,2144 1765.14,2128.86 1798.19,2128.86 U1.50
IMU_Int2: IC4.9 U1.52 | length 1077.2
  Top Layer w10: IC4.9 1345.77,2705.77 1300,2660 1300,2590 1350,2540 1610,2540 1716,2434 1716,2115 1742.42,2088.58 U1.52
NetC10_1: C10.1 U1.30 | length 99.8
  Top Layer w10: U1.30 2251.77,2109.13 2299.13,2109.13 v1(2300,2110)
  Bottom Layer w10: v1(2300,2110) C10.1
NetIC2_3: IC2.3 R6.1 | length 76.9
  Top Layer w10: R6.1 1708.46,1125 IC2.3
NetIC2_7: IC2.7 R5.1 | length 66.9
  Top Layer w10: IC2.7 2121.54,1175 R5.1
NRST: C8.2 J1.3 J2.1 U1.7 | length 1402.8
  Top Layer w10: U1.7 1996.38,1775 1996.38,1806.38 2050,1860 2130,1860 2170,1820 2281.55,1820 2320,1858.44 v1(2320,2020) ; J1.3 2355.36,2474.64 2406.61,2423.39 2406.61,2343.39 J2.1
  Bottom Layer w10: C8.2 2223.66,2309.12 2439.12,2309.12 J2.1 2379.49,2249.49 2379.49,2089.91 2366.85,2077.28 2347.28,2077.28 2320,2050 v1(2320,2020)
PT1_ADC: C15.2 R7.1 R8.1 R9.2 U1.25 Z1.1 | length 2115.8
  Top Layer w10: v1(1765,3508) 1810,3463 1810,2770 1763.43,2723.43 1763.43,2526.57 v1(1800,2490) ; v1(2080,2130) 2080,2060 2130.16,2009.84 U1.25
  Bottom Layer w10: R8.1 R7.1 1598.66,3677.01 R9.2 1631.34,3642.12 1664.12,3609.34 Z1.1 1665.42,3608.42 1670.04,3608.42 C15.2 1702.73,3570.27 v1(1765,3508) ; v1(1800,2490) 2080,2210 v1(2080,2130)
PT1_IN: J5.3 R7.2 R8.2 | length 193.4
  Bottom Layer w10: J5.3 1491.65,3711.35 R8.2 R7.2
PT2_ADC: C17.2 R13.1 R14.1 R15.2 U1.24 Z3.1 | length 2142.3
  Top Layer w10: R13.1 R14.1 1425.99,3634.34 R15.2 1512.73,3547.6 C17.2 1515.51,3545.73 Z3.1 1750,3311.24 1750,2740 1740,2730 1740,2510 v1(1800,2450) ; v1(2060,2160) 2060,2040 2109.84,1990.16 U1.24
  Bottom Layer w10: v1(1800,2450) 2060,2190 v1(2060,2160)
PT2_IN: J9.3 R13.2 R14.2 | length 170.9
  Top Layer w10: R14.2 R13.2 1391.68,3741.32 1391.68,3802.22 J9.3
PT3_ADC: C18.2 R16.1 R17.1 R18.2 U1.27 Z4.1 | length 2078
  Top Layer w10: v1(1830,2540) 1810,2560 1810,2690 1870.21,2750.21 1870.21,3010.5 1891,3031.29 1891,3401 2038,3548 R18.2 ; R16.1 R17.1 2045,3614.14 2061.14,3598 Z4.1@2064.8,3598 ; C18.2@2063.5,3486.03 C18.2 2061.54,3489.97 2061.54,3541.54 R18.2 ; Z4.1 Z4.1@2064.8,3598 ; v1(2120,2130) 2120,2100 2170.79,2049.21 U1.27 ; R18.2 2061.54,3568.06 2061.54,3594.73 Z4.1@2064.8,3598
  Bottom Layer w10: v1(1830,2540) 2120,2250 v1(2120,2130)
PT3_IN: J10.3 R16.2 R17.2 | length 150.3
  Top Layer w10: J10.3 1995,3817.02 R16.2 R17.2
PT4_ADC: C16.2 R10.1 R11.1 R12.2 U1.26 Z2.1 | length 2099
  Top Layer w10: v1(1830,2500) 1788.79,2541.21 1788.79,2711.21 1848.99,2771.42 1848.99,3031.72 1861,3043.72 1861,3411 v1@1902.13,3452.13 ; v1(2100,2157.06) 2100,2080 2150.47,2029.53 U1.26
  Bottom Layer w10: v1(1830,2500) 2100,2230 v1(2100,2157.06) ; v1(1900,3450) 1977,3450 2016.5,3489.5 C16.2 2014.53,3529.97 Z2.1 R12.2 R10.1 R11.1
PT4_IN: J6.3 R10.2 R11.2 | length 169.5
  Bottom Layer w10: R10.2 R11.2 2116.46,3702.92 J6.3
SEL: J10.4 U1.28 | length 2331.2
  Top Layer w10: v1(1935,3908) 2089.33,3908 2092.08,3905.72 cw(c1826.65,3588.36) 2113.53,3886.47 2116.46,3883.54 2116.46,3872.84 J10.4 ; v1(2140,2156.69) 2140,2110 2181.1,2068.9 U1.28
  Bottom Layer w10: v1(1935,3908) 1855,3828 1855,2745 2060,2540 2060,2370 2140,2290 v1(2140,2156.69)
SPI1_MISO: IC4.1 U1.22 | length 1201.8
  Top Layer w10: IC4.1 1583.6,2666.4 v1(1660,2590) ; v1(1900,2110) 2059.21,1950.79 U1.22
  Bottom Layer w10: v1(1660,2590) 1740,2510 1740,2270 v1(1900,2110)
SPI1_MOSI: IC4.14 U1.23 | length 1219
  Top Layer w10: IC4.14 1460,2655.57 1495.57,2620 v1(1530,2620) ; v1(1910,2140) 2079.53,1970.47 U1.23
  Bottom Layer w10: v1(1530,2620) 1660,2620 1760,2520 1760,2281.21 1899.68,2141.53 1908.47,2141.53 v1(1910,2140)
SPI1_SCK: IC4.13 U1.21 | length 1270.9
  Top Layer w10: IC4.13 1442.2,2658.11 1442.2,2627.8 1480,2590 1620,2590 v1(1670,2540) ; v1(1899.06,2070.94) 2038.9,1931.1 U1.21
  Bottom Layer w10: v1(1670,2540) 1720,2490 1720,2250 v1(1899.06,2070.94)
SPI2_MISO: IC2.2 U1.10 | length 763
  Top Layer w10: IC2.2 1855,1175 1900,1220 v1(1900,1340) ; U1.10 2054.53,1727.64 2060,1722.16 v1(2060,1720)
  Bottom Layer w10: v1(1900,1340) 1900,1360 2060,1520 v1(2060,1720)
SPI2_MOSI: IC2.5 U1.9 | length 847.9
  Top Layer w10: v1(1930,1430) 1930,1120 1975,1075 IC2.5 ; v1(2030,1720) 2030,1722.16 2034.84,1727.01 U1.9
  Bottom Layer w10: v1(1930,1430) 1930,1480 2030,1580 v1(2030,1720)
SPI2_SCK: IC2.6 U1.29 | length 1252.1
  Top Layer w10: IC2.6 2005,1125 1980,1150 1980,1350 2340,1710 2340,2060 2311.42,2088.58 U1.29
SWCLK: J1.4 U1.49 | length 1084.3
  Top Layer w10: U1.49 1799.09,2219.09 1900,2320 1900,2560 1870,2590 1870,2670 1890,2690 2150,2690 2269.29,2570.71 J1.4
SWDIO: J1.2 U1.46 | length 974.9
  Top Layer w10: U1.46 1916.73,2583.27 1890,2610 1890,2650 1910,2670 1970,2670 2020,2620 2020,2560 2100,2480 2225.75,2480 2281.11,2535.36 J1.2
USART6_RX: J8.4 U1.38 | length 795.9
  Top Layer w10: v1(1995.27,2414.73) 2074.21,2335.79 U1.38
  Bottom Layer w10: J8.4 1678.11,2761.89 1740,2700 1740,2670 v1(1995.27,2414.73)
USART6_TX: J8.3 U1.37 | length 889.3
  Top Layer w10: v1(2007.08,2448.19) 2008.19,2448.19 2010,2450 2093.9,2366.1 U1.37
  Bottom Layer w10: J8.3 1614.76,2880 1770,2724.76 1770,2685.27 v1(2007.08,2448.19)
VBAT: J4.1
VCC: C1.2 C2.2 C3.2 C4.2 C5.2 C6.2 C7.1 C9.2 C11.2 C14.2 C19.2 C20.2 IC1.3 IC2.8 IC3.1 IC3.2 IC4.5 IC4.8 J1.1 J3.1 J7.2 J7.4 R1.2 R2.2 R5.2 R6.2 R19.2 U1.1 U1.13 U1.19 U1.32 U1.48 U1.64 | length 1530.5
  Top Layer w10: v1(1320,2610) R19.2 ; v1(1328.52,2770) 1330.05,2768.47 1330.05,2763.41 1351.5,2741.97 C20.2 1380,2740 1388.23,2731.77 1388.23,2727.34 1390.12,2725.45 IC4.8 ; v1(1370,1210) C14.2 1409.96,1171.5 1416.85,1164.61 IC3.2 IC3.1 ; IC4.5 C19.2 1461.5,2780 v1(1490,2780) ; v1(1530,1270) 1532.16,1270 1535.63,1273.46 R1.2 ; R2.2 1572.32,1098.86 v1(1602.14,1098.86) ; R6.2 1638.47,1128.07 1638.47,1101.53 v1(1640,1100) ; U1.64 1800,1851.46 v1(1800,1830) ; v1(1850,1790) 1876.46,1790 1877.36,1789.09 U1.1 ; U1.48 1878.27,2226.81 1878.27,2256.21 1888.47,2266.41 1888.47,2278.47 v1(1890,2280) ; v1(2030,1290) C11.2 2061.73,1283.23 IC2.8 ; U1.13 2113.58,1821.42 2120,1827.84 v1(2120,1830) ; R5.2 2210,1196.54 v1(2210,1210) ; v1(2200,1900) 2202.16,1900 2209.53,1892.64 2250,1892.64 U1.19 ; U1.32 2259.09,2147.64 2260,2148.54 v1(2260,2170) ; v1(2280,2440) 2281.53,2441.53 2281.53,2458 2320,2496.46 J1.1
  Bottom Layer w10: C9.2 1725,2926.5 IC1.3 1720,2994.61 v1(1720,3050) ; C3.2 1741.5,1830 v1(1800,1830) ; C2.2 C2.2@1832.99,1711.5 ; v1(1850,1790) 1850,1787.84 1843.23,1781.06 1843.23,1721.73 C2.2@1832.99,1711.5 ; C5.2 1862.27,2307.73 v1(1890,2280) ; C6.2 C2.2@1832.99,1711.5 ; C1.2 v1(2120,1830) ; C7.1 2181.5,1900 v1(2200,1900) ; v1(2260,2170) 2318.5,2170 C4.2 ; J7.4 v1(2430,2000) ; J7.2 v1(2430,2050)
XTAL_1: C12.2 U1.5 Y1.1 | length 367.3
  Top Layer w10: Y1.1 1934.88,1588.66 1924.72,1578.5 C12.2 1868.27,1590.24 1849.76,1590.24 1840,1600 1840,1670 1870,1700 1930,1700 1956.1,1726.1 U1.5
XTAL_2: C13.2 U1.6 Y1.3 | length 245.7
  Top Layer w10: U1.6 1975.79,1714.21 2000,1690 2030,1690 2050,1670 C13.2 2038.5,1630 Y1.3
pads on no net: IC1.5 IC3.6 IC4.10 IC4.11 J1.6 J1.A J1.B J1.C J1.D J1.E J1.F J1.G J4.5 J4.6 J5.4 J5.5 J5.6 J6.4 J6.5 J6.6 J7.5 J7.6 J7.7 J7.8 J7.9 J7.10 J7.12 J7.13 J7.14 J7.15 J7.17 J7.21 J7.23 J7.25 J8.5 J8.6 J9.4 J9.5 J9.6 J10.5 J10.6 U1.3 U1.4 U1.8 U1.17 U1.20 U1.33 U1.34 U1.35 U1.36 U1.39 U1.40 U1.41 U1.42 U1.43 U1.53 U1.54 U1.55 U1.56 U1.57 U1.61 U1.62

## Polygon pours and split planes (outlines as drawn)
GND on GND "GND_L02_P003" (solid, pour order 3): 995.71,1147.4 cw(c1213.58,1166.36) 995.12,1156.37 cw(c1162.94,1163) 994.99,1163 995.78,1165.72 cw(c1150,1150) 1150,1305.02 1537,1305.02 ccw(c1537,1463) 1694.98,1463 1694.98,2337 ccw(c1537,2337) 1537,2494.99 1163,2494.99 cw(c1163,2663) 994.99,2663 994.99,4253 cw(c1163,4253) 1163,4421.02 2337,4421.02 cw(c2337,4253) 2505.01,4253 2505.01,3538 cw(c2337,3538) 2337,3369.99 2088,3369.99 ccw(c2088,3212) 1930.02,3212 1930.02,2888 ccw(c2088,2888) 2088,2730.01 2337,2730.01 cw(c2337,2562) 2505.01,2562 2505.01,1163 cw(c2337,1163) 2337,994.99 1163,994.99 cw(c1163,1163)
VCC on PWR "VCC_L03_P004" (solid, pour order 4): 995.71,1147.4 cw(c1213.58,1166.36) 995.12,1156.37 cw(c1162.94,1163) 994.99,1163 995.78,1165.72 cw(c1150,1150) 1150,1305.02 1537,1305.02 ccw(c1537,1463) 1694.98,1463 1694.98,2337 ccw(c1537,2337) 1537,2494.99 1163,2494.99 cw(c1163,2663) 994.99,2663 994.99,4253 cw(c1163,4253) 1163,4421.02 2337,4421.02 cw(c2337,4253) 2505.01,4253 2505.01,3538 cw(c2337,3538) 2337,3369.99 2088,3369.99 ccw(c2088,3212) 1930.02,3212 1930.02,2888 ccw(c2088,2888) 2088,2730.01 2337,2730.01 cw(c2337,2562) 2505.01,2562 2505.01,1163 cw(c2337,1163) 2337,994.99 1163,994.99 cw(c1163,1163)

## Silkscreen, mask and mechanical layers (free items; w line width, h text height)
Top Overlay:
  drawing of 32 lines, arcs and shapes, not listed
Bottom Overlay:
  drawing of 12 lines, arcs and shapes, not listed
Mechanical 1:
  lines w10: 1000,1150 cw(c1150,1150) 1150,1300 1537,1300 ccw(c1537,1463) 1700,1463 1700,2337 ccw(c1537,2337) 1537,2500 1163,2500 cw(c1163,2663) 1000,2663 1000,3837 1000,4132 1000,4253 cw(c1163,4253) 1163,4416 2337,4416 cw(c2337,4253) 2500,4253 2500,4055 2500,3837 2500,3538 cw(c2337,3538) 2337,3375 2088,3375 ccw(c2088,3212) 1925,3212 1925,2888 ccw(c2088,2888) 2088,2725 2337,2725 cw(c2337,2562) 2500,2562 2500,1163 cw(c2337,1163) 2337,1000 1600,1000 1163,1000 cw(c1163,1163) 1000,1163